# EAGLE board chessbot1final (EAGLE 7.5.0)
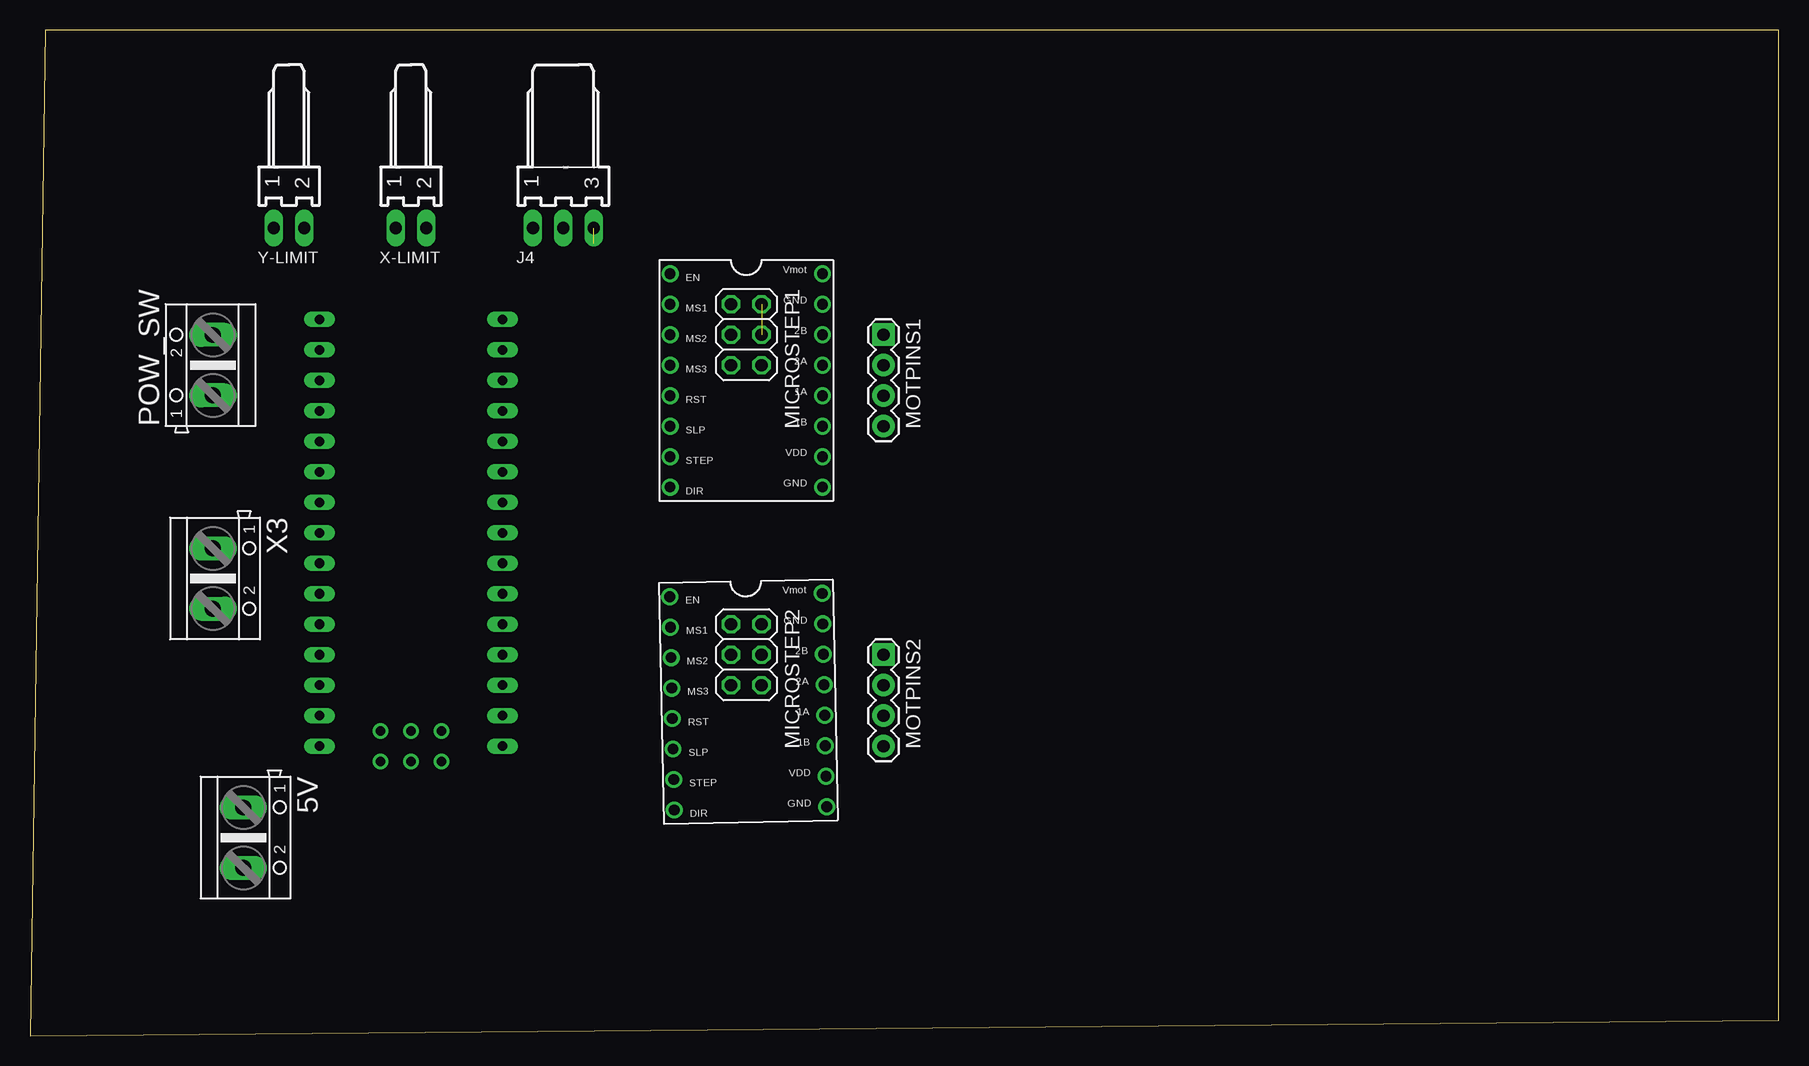
[diagram p0: board, top side]
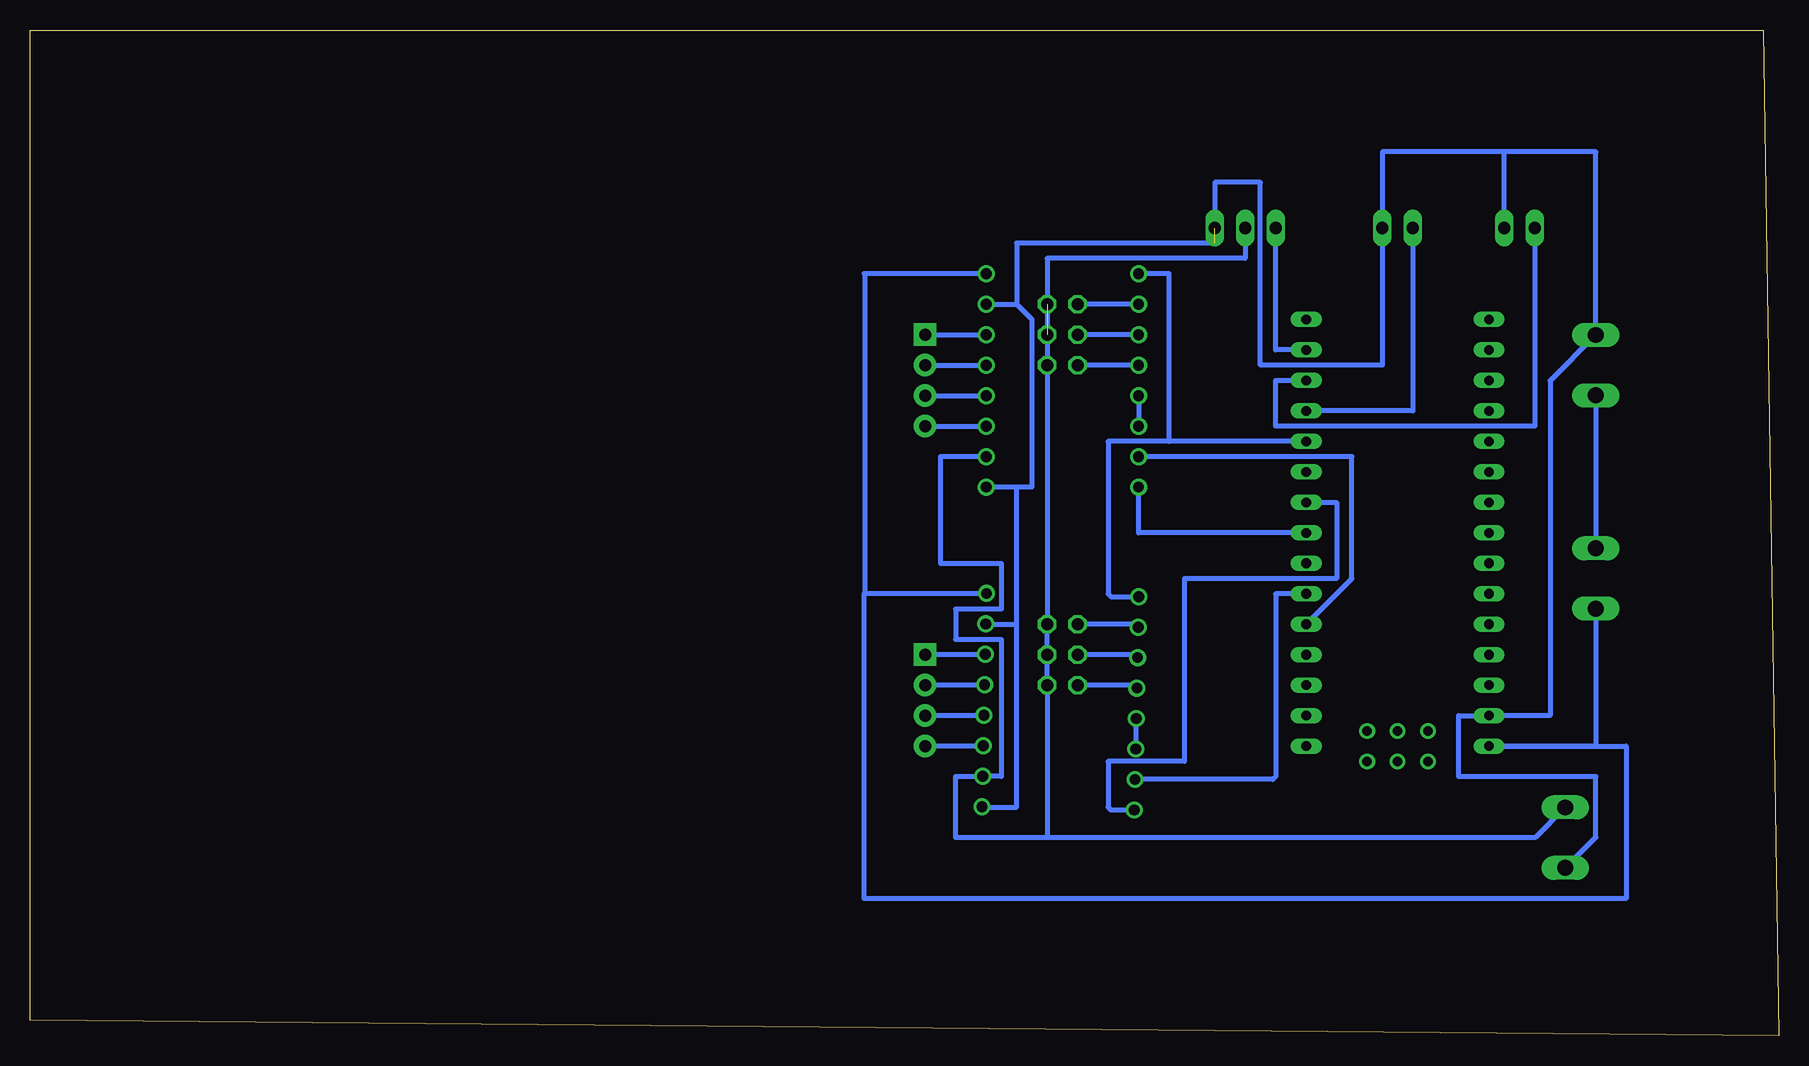
[diagram p1: board, bottom side, seen from below]

Size 145.72 x 83.81 mm. Coordinates in mm from the lower left corner, seen from the top.
Outline: 0,0 145.72,1.27 145.72,83.81 1.27,83.81 0,0
Copper layers (1*16): Top 0.035mm / dielectric 1.5mm / Bottom 0.035mm
Design rules "default": minimum track width 10mil, minimum drill 24mil, track to track 8mil, track to pad 8mil, pad to pad 8mil, via to via 8mil, smd to smd 8mil, copper to edge 40mil, drill to drill 8mil, minimum pad ring 10mil, minimum via ring 8mil, stop-mask expansion 4mil, vias tented up to drill 0mil, thermal gap 10mil

## Footprints (pad centres in the part's own frame; a part is rotated, then mirrored left to right if it is on the bottom)
AK500/2 = drill 1.321 long: 1 -2.515,0; 2 2.515,0
7395-03 = drill 1.016 long: 1 2.54,0; 2 0,0; 3 -2.54,0
2X03 = drill 1.016 octagon: 1 -2.54,-1.27; 2 -2.54,1.27; 3 0,-1.27; 4 0,1.27; 5 2.54,-1.27; 6 2.54,1.27
1X04 = drill 1.016 pad 1.88 square: 1 0,0 | drill 1.016 pad 1.88: 2 2.54,0; 3 5.08,0; 4 7.62,0
A4988BREAKOUT = drill 0.9: 1A 8.89,1.27; 1B 11.43,1.27; 2A 6.35,1.27; 2B 3.81,1.27; DIR 16.51,-11.43; EN -1.27,-11.43; GND 16.51,1.27; GND@0 1.27,1.27; MS1 1.27,-11.43; MS2 3.81,-11.43; MS3 6.35,-11.43; RST 8.89,-11.43; SLP 11.43,-11.43; STEP 13.97,-11.43; VDD 13.97,1.27; VMOT -1.27,1.27
NANO = drill 0.8 long: 3.3V -10.16,24.13; 5V -10.16,-1.27; A0 -10.16,19.05; A1 -10.16,16.51; A2 -10.16,13.97; A3 -10.16,11.43; A4 -10.16,8.89; A5 -10.16,6.35; A6 -10.16,3.81; A7 -10.16,1.27; AREF -10.16,21.59; D2 5.08,1.27; D3 5.08,3.81; D4 5.08,6.35; D5 5.08,8.89; D6 5.08,11.43; D7 5.08,13.97; D8 5.08,16.51; D9 5.08,19.05; D10 5.08,21.59; D11 5.08,24.13; D12 5.08,26.67; D13 -10.16,26.67; GND -10.16,-6.35; GND1 5.08,-1.27; RAW -10.16,-8.89; RST -10.16,-3.81; RST1 5.08,-3.81; RX1 5.08,-6.35; TX0 5.08,-8.89 | drill 0.8: ICSP1 -5.08,-10.16; ICSP2 -5.08,-7.62; ICSP3 -2.54,-10.16; ICSP4 -2.54,-7.62; ICSP5 0,-10.16; ICSP6 0,-7.62
7395-02 = drill 1.016 long: 1 1.27,0; 2 -1.27,0

## Placement (x,y rotation side)
5V  [AK500/2]  17.78,16.51 270 top
J4  22-05-7038-03  [7395-03]  44.45,67.31 180 top
MICROSTEP1  [2X03]  59.69,58.42 270 top
MICROSTEP2  [2X03]  59.69,31.75 270 top
MOTPINS1  [1X04]  71.12,58.42 270 top
MOTPINS2  [1X04]  71.12,31.75 270 top
POW_SW  [AK500/2]  15.24,55.88 90 top
U$1  A4988BREAKOUT  [A4988BREAKOUT]  64.77,35.56 271.2 top
U$2  A4988BREAKOUT  [A4988BREAKOUT]  64.77,62.23 270 top
U$3  NANO  [NANO]  34.29,33.02 0 top
X3  [AK500/2]  15.24,38.1 270 top
X-LIMIT  22-05-7028-02  [7395-02]  31.75,67.31 180 top
Y-LIMIT  22-05-7028-02  [7395-02]  21.59,67.31 180 top

## Library data of the parts
5V POW_SW X3 = con-ptr500; OC_FARNELL: unknown; OC_NEWARK: unknown
J4 = con-molex; OC_FARNELL: unknown; OC_NEWARK: unknown
MICROSTEP1 MICROSTEP2 = pinhead
MOTPINS1 MOTPINS2 = SparkFun-Connectors; PROD_ID: CONN-09696
U$1 U$2 = RepRapjr
U$3 = Arduino-clone
X-LIMIT Y-LIMIT = con-molex; OC_FARNELL: 9731601; OC_NEWARK: unknown

## Nets
5V: 5V.1 J4.2 MICROSTEP1.2 MICROSTEP1.4 MICROSTEP1.6 MICROSTEP2.2 MICROSTEP2.4 MICROSTEP2.6 U$1.VDD U$2.VDD
12V: U$1.VMOT U$2.VMOT U$3.RAW X3.2
EN: U$1.EN U$2.EN U$3.D8
GND: 5V.2 J4.3 POW_SW.2 U$1.GND U$1.GND@0 U$2.GND U$2.GND@0 U$3.GND X-LIMIT.2 Y-LIMIT.2
N$1: MOTPINS1.4 U$2.1B
N$2: MOTPINS1.3 U$2.1A
N$3: MOTPINS1.2 U$2.2A
N$4: MOTPINS1.1 U$2.2B
N$5: MOTPINS2.1 U$1.2B
N$6: MOTPINS2.2 U$1.2A
N$7: MOTPINS2.3 U$1.1A
N$8: MOTPINS2.4 U$1.1B
N$9: MICROSTEP1.1 U$2.MS1
N$10: MICROSTEP1.3 U$2.MS2
N$11: U$2.RST U$2.SLP
N$12: MICROSTEP2.3 U$1.MS2
N$13: MICROSTEP2.1 U$1.MS1
N$14: MICROSTEP2.5 U$1.MS3
N$15: POW_SW.1 X3.1
N$16: MICROSTEP1.5 U$2.MS3
N$26: U$1.RST U$1.SLP
SERVO: J4.1 U$3.D11
XDIR: U$2.DIR U$3.D5
XENDSTOP: U$3.D9 X-LIMIT.1
XSTEP: U$2.STEP U$3.D2
YDIR: U$1.DIR U$3.D6
YENDSTOP: U$3.D10 Y-LIMIT.1
YSTEP: U$1.STEP U$3.D3
ZENDSTOP: U$3.D12

## Tracks (layer width: path | path; a pad name or v marks a point on that pad's centre or on a via)
5V  (1 unrouted)
  Bottom 0.406: 60.96,16.51 MICROSTEP2.6 MICROSTEP2.4 MICROSTEP2.2 MICROSTEP1.6 MICROSTEP1.2 60.96,64.77 44.45,64.77 J4.2 | 60.96,16.51 68.58,16.51 68.58,21.59 68.55,21.62 U$1.VDD 64.8,21.62 64.77,21.59 64.77,33.02 68.58,33.02 68.58,35.56 64.77,35.56 64.77,39.37 69.85,39.37 69.85,48.26 U$2.VDD | 5V.1 20.29,16.51 60.96,16.51
12V
  Bottom 0.406: X3.2 15.24,24.13 U$3.RAW 12.7,24.13 12.7,11.43 76.2,11.43 76.2,36.83 76.17,36.86 | 66.04,36.83 U$1.VMOT 76.17,36.86 | U$2.VMOT 76.2,63.5 76.17,63.47 76.17,36.86
EN
  Bottom 0.406: U$3.D8 50.8,49.53 | 50.8,49.53 50.8,63.5 U$2.EN | 53.56,36.83 U$1.EN 55.64,36.59 55.88,36.83 55.88,49.53 50.8,49.53
GND  (1 unrouted)
  Bottom 0.406: U$2.GND@0 63.5,60.96 | 63.5,60.96 62.23,59.69 62.23,45.72 63.5,45.72 | 63.5,45.72 U$2.GND | 63.5,60.96 63.5,66.04 46.99,66.04 46.99,71.12 43.18,71.12 43.18,55.88 33.02,55.88 X-LIMIT.2 33.02,73.66 22.86,73.66 | 22.86,73.66 15.24,73.66 POW_SW.2 19.05,54.59 19.05,26.67 U$3.GND 26.67,26.67 26.67,21.59 15.24,21.59 15.24,16.51 15.26,16.51 5V.2 | Y-LIMIT.2 22.86,73.66 | U$1.GND 66.36,19.05 63.5,19.05 63.5,34.29 | 63.5,34.29 63.5,45.72 | U$1.GND@0 66.04,34.29 63.5,34.29
N$1
  Bottom 0.406: MOTPINS1.4 U$2.1B
N$2
  Bottom 0.406: MOTPINS1.3 U$2.1A
N$3
  Bottom 0.406: MOTPINS1.2 U$2.2A
N$4
  Bottom 0.406: MOTPINS1.1 U$2.2B
N$5
  Bottom 0.406: MOTPINS2.1 71.09,31.78 U$1.2B
N$6
  Bottom 0.406: MOTPINS2.2 71.09,29.24 U$1.2A
N$7
  Bottom 0.406: MOTPINS2.3 71.09,26.7 U$1.1A
N$8
  Bottom 0.406: MOTPINS2.4 71.09,24.16 U$1.1B
N$9
  Bottom 0.406: U$2.MS1 MICROSTEP1.1
N$10
  Bottom 0.406: U$2.MS2 MICROSTEP1.3
N$11
  Bottom 0.406: U$2.RST U$2.SLP
N$12
  Bottom 0.406: U$1.MS2 53.66,31.75 MICROSTEP2.3
N$13
  Bottom 0.406: U$1.MS1 53.61,34.29 MICROSTEP2.1
N$14
  Bottom 0.406: U$1.MS3 53.71,29.21 MICROSTEP2.5
N$15
  Bottom 0.406: POW_SW.1 X3.1
N$16
  Bottom 0.406: U$2.MS3 MICROSTEP1.5
N$26
  Bottom 0.406: U$1.SLP 53.53,23.95 U$1.RST
SERVO
  Bottom 0.406: U$3.D11 41.91,57.15 J4.1
XDIR
  Bottom 0.406: U$3.D5 53.34,41.91 U$2.DIR
XENDSTOP
  Bottom 0.406: X-LIMIT.1 30.48,52.07 U$3.D9
XSTEP
  Bottom 0.406: U$2.STEP 38.1,48.26 36.83,48.26 35.56,48.26 35.56,38.1 U$3.D2
YDIR
  Bottom 0.406: U$3.D6 36.83,44.45 36.83,38.1 49.53,38.1 49.53,22.86 55.88,22.86 55.88,19.05 55.64,18.81 U$1.DIR
YENDSTOP
  Bottom 0.406: Y-LIMIT.1 20.32,50.8 41.91,50.8 41.91,54.61 U$3.D10
YSTEP
  Bottom 0.406: U$3.D3 41.91,36.83 41.91,21.59 42.15,21.35 U$1.STEP